# EAGLE board MultiWiiChassis_inconsistent (EAGLE 6.2)
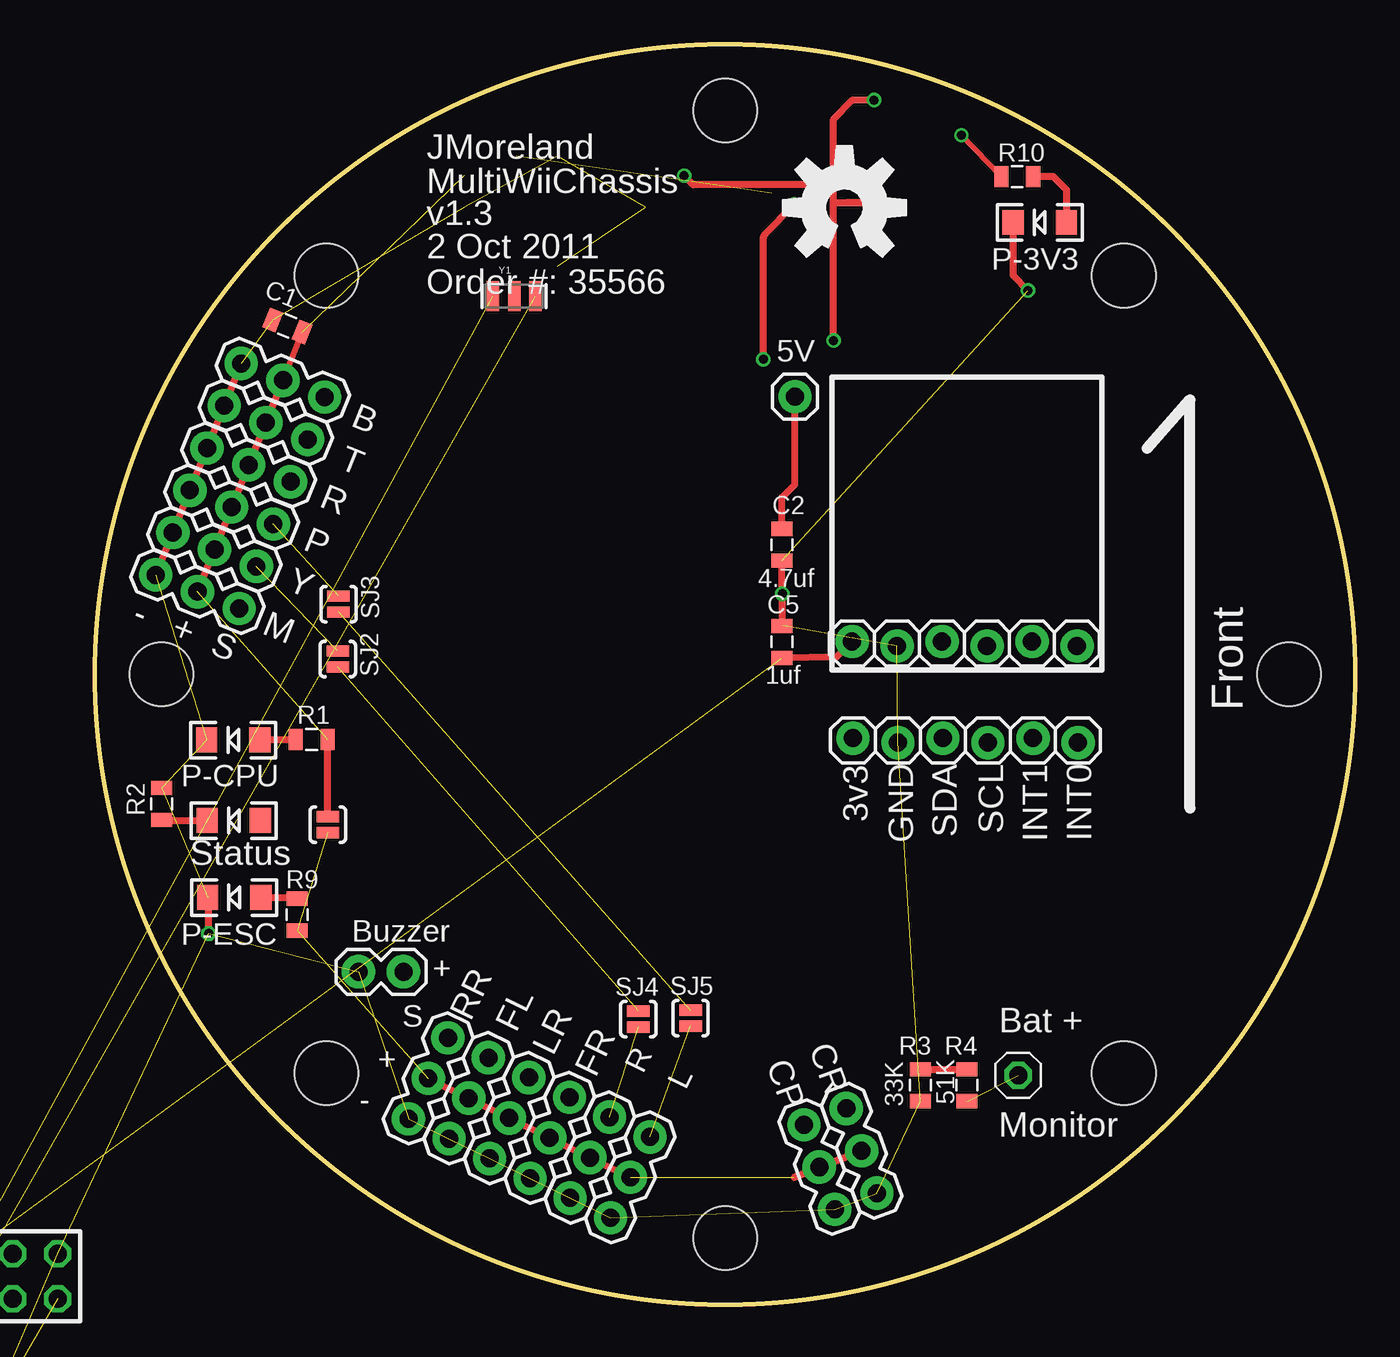
[diagram p0: board, top side]
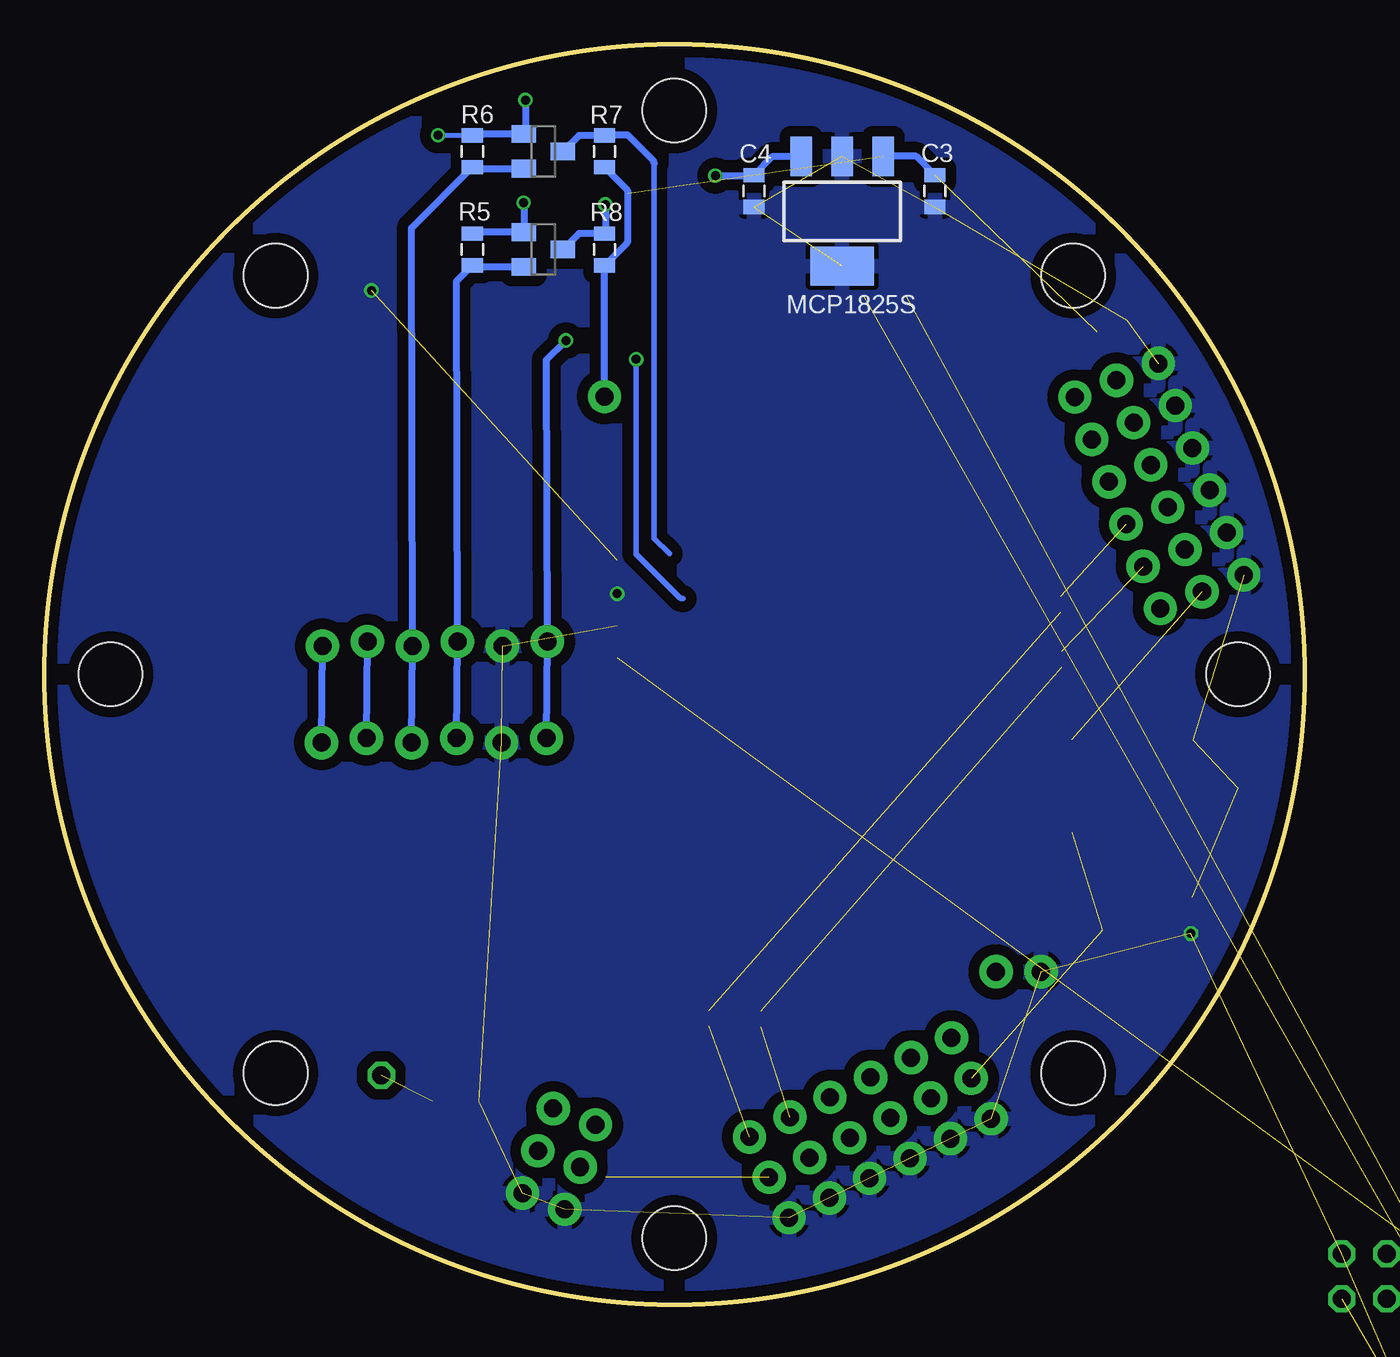
[diagram p1: board, bottom side, seen from below]

Size 71.12 x 71.12 mm. Coordinates in mm from the lower left corner, seen from the top.
Outline: circle at 35.56,35.56 radius 35.56
Copper layers (1*16): Top 0.035mm / dielectric 1.5mm / Bottom 0.035mm
Design rules: minimum track width 6mil, minimum drill 12mil, track to track 6mil, track to pad 6mil, pad to pad 6mil, via to via 6mil, smd to smd 0mil, copper to edge 10mil, drill to drill 10mil, minimum pad ring 10mil, minimum via ring 6mil, stop-mask expansion 2mil, vias tented up to drill 100mil, thermal gap 10mil
Holes 3.6 mm at 35.56,67.38 67.38,35.56 35.56,3.74 3.74,35.56 13.06,13.06 13.06,58.06 58.06,58.06 58.06,13.06

## Footprints (pad centres in the part's own frame; a part is rotated, then mirrored left to right if it is on the bottom)
1X01 = drill 1.016 pad 1.88: 1 0,0
1X02 = drill 1.016 pad 1.88: 1 0,0; 2 2.54,0
SOT23_BOT = smd 1 x 1.4 bottom: D 0,1.1; G 0.98,-1.1; S -0.98,-1.1
0805 = smd 0.8 x 1.2: 1 -0.9,0; 2 0.9,0
1X03 = drill 1.016 pad 1.88: 1 0,0; 2 2.54,0; 3 5.08,0
1X01' = drill 1.016 octagon: 1 0,0
1X06_LOCK = drill 1.016 pad 1.88: 1 0,0; 2 2.54,-0.254; 3 5.08,0; 4 7.62,-0.254; 5 10.16,0; 6 12.7,-0.254
LED-1206 = smd 1.2 x 1.4: A -1.5,0; C 1.5,0
SOT223_BOT = smd 1.219 x 2.235 bottom: 1 2.311,-3.099; 2 0,-3.099; 3 -2.311,-3.099 | smd 3.6 x 2.2 bottom: GNDPAD 0,3.099
AVR-ISP-6 = drill 1.016 square: 1 -2.54,-1.27 | drill 1.016 octagon: 2 -2.54,1.27; 3 0,-1.27; 4 0,1.27; 5 2.54,-1.27; 6 2.54,1.27
0603-RES = smd 1.1 x 1: 1 -0.85,0; 2 0.85,0
TACTILE_SWITCH_SMD = smd 1.524 x 0.762: 1 -2.54,1.905; 2 2.54,1.905; 3 -2.54,-1.905; 4 2.54,-1.905
SJ_2S-NO = smd 0.635 x 1.27: 1 -0.45,0; 2 0.45,0
TQFP32-08 = smd 1.27 x 0.559: 1 -4.293,2.8; 2 -4.293,2; 3 -4.293,1.2; 4 -4.293,0.4; 5 -4.293,-0.4; 6 -4.293,-1.2; 7 -4.293,-2; 8 -4.293,-2.8; 17 4.293,-2.8; 18 4.293,-2; 19 4.293,-1.2; 20 4.293,-0.4; 21 4.293,0.4; 22 4.293,1.2; 23 4.293,2; 24 4.293,2.8 | smd 0.559 x 1.27: 9 -2.8,-4.293; 10 -2,-4.293; 11 -1.2,-4.293; 12 -0.4,-4.293; 13 0.4,-4.293; 14 1.2,-4.293; 15 2,-4.293; 16 2.8,-4.293; 25 2.8,4.293; 26 2,4.293; 27 1.2,4.293; 28 0.4,4.293; 29 -0.4,4.293; 30 -1.2,4.293; 31 -2,4.293; 32 -2.8,4.293
RESONATOR-SMD = smd 0.7 x 1.7: 1 -1.2,0; 2 0,0; 3 1.2,0

## Placement (x,y rotation side)
5V  M01PTH  [1X01]  39.5,51.23 0 top
+  Buzzer  [1X02]  17.4,18.77 180 top
BSS138-SCL  BSS138BOTTOM  [SOT23_BOT]  42.95,65.07 90 top
BSS138-SDA  BSS138BOTTOM  [SOT23_BOT]  42.95,59.54 90 top
C1  4.7uf  [0805]  10.85,55.22 158 top
C2  4.7uf  [0805]  38.76,42.88 270 top
C3  4.7uf  [0805]  20.85,62.84 270 bottom
C4  1uf  [0805]  31.06,62.84 270 bottom
C5  1uf  [0805]  38.76,37.39 90 top
JP1  T  [1X03]  11.99,48.82 158 top
JP2  R  [1X03]  11.02,46.43 158 top
JP3  P  [1X03]  10.06,44.04 158 top
JP4  Y  [1X03]  9.09,41.66 158 top
JP5  M  [1X03]  8.13,39.27 158 top
JP6  CR  [1X03]  42.39,11.05 290 top
JP7  RR  [1X03]  19.91,15.04 244 top
JP8  FL  [1X03]  22.2,13.92 244 top
JP9  LR  [1X03]  24.49,12.8 244 top
JP10  FR  [1X03]  26.77,11.68 244 top
JP11  Bat +  [1X01']  52.1,12.93 0 top
JP12  [1X06_LOCK]  42.77,31.95 0 top
JP13  CP  [1X03]  40.01,10.13 290 top
JP14  B  [1X03]  12.95,51.21 158 top
JP15  R  [1X03]  29.03,10.57 244 top
JP16  [1X06_LOCK]  42.72,37.41 0 top
JP17  L  [1X03]  31.32,9.45 244 top
LED1  Status  [LED-1206]  7.82,27.3 180 top
LED2  P-CPU  [LED-1206]  7.8,31.85 180 top
LED3  P-ESC  [LED-1206]  7.85,22.96 180 top
LED4  P-3V3  [LED-1206]  53.31,61.06 180 top
MCP1825S  V_REG_MCP1825S  [SOT223_BOT]  26.09,61.7 180 top
PDI  AVR-PDIVERT  [AVR-ISP-6]  -4.65,1.57 0 top
R1  470  [0805]  12.22,31.88 0 top
R2  470  [0805]  3.76,28.24 270 top
R3  33K  [0805]  46.58,12.37 90 top
R4  51K  [0805]  49.2,12.37 90 top
R5  10k  [0805]  46.96,59.54 90 bottom
R6  10k  [0805]  46.96,65.07 90 bottom
R7  10k  [0805]  39.5,65.07 270 bottom
R8  10k  [0805]  39.5,59.54 270 bottom
R9  470  [0805]  11.4,22 270 top
R10  470  [0805]  52.04,63.65 180 top
R11  10k  [0603-RES]  -8.1,-11.43 0 top  (outside the outline)
R12  47k  [0603-RES]  -8.1,-8.43 0 top  (outside the outline)
S2  [TACTILE_SWITCH_SMD]  -6.99,-22.5 0 top  (outside the outline)
SJ1  SOLDERJUMPERNO  [SJ_2S-NO]  13.13,27.08 270 top
SJ2  SOLDERJUMPERNO  [SJ_2S-NO]  13.69,36.42 270 top
SJ3  SOLDERJUMPERNO  [SJ_2S-NO]  13.74,39.52 270 top
SJ4  SOLDERJUMPERNO  [SJ_2S-NO]  30.66,16.1 270 top
SJ5  SOLDERJUMPERNO  [SJ_2S-NO]  33.6,16.15 270 top
U1  ATMEGA168  [TQFP32-08]  -15.32,-18.29 0 top  (outside the outline)
U$10  [OSHW-LOGO-L]  42.29,61.9 0 top
Y1  [RESONATOR-SMD]  23.65,56.9 0 top

## Library data of the parts
5V + C1-C5 JP1-JP10 JP12-JP17 LED1-LED4 R1-R12 S2 SJ1-SJ5 U$10 = SparkFun
BSS138-SCL BSS138-SDA MCP1825S = JCM
JP11 = pinhead
PDI = avr-7
U1 = SparkFun-DigitalIC
Y1 = SparkFun-FreqCtrl

## Nets
3.3V: BSS138-SCL.G BSS138-SDA.G C4.1 C5.1 JP12.1 JP16.1 MCP1825S.3 PDI.2 R5.2 R6.2 R10.2 R11.2 R12.2
5V: 5V.1 C1.1 C2.1 C3.1 JP1.2 JP2.2 JP3.2 JP4.2 JP5.2 JP14.2 MCP1825S.1 R1.2 R7.2 R8.2 SJ1.1
BUZZER: +.1
D5: SJ3.2 SJ5.1
D6: SJ2.2 SJ4.1
GND: +.2 C1.2 C2.2 C3.2 C4.2 C5.2 JP1.3 JP2.3 JP3.3 JP4.3 JP5.3 JP6.3 JP7.3 JP8.3 JP9.3 JP10.3 JP12.2 JP13.3 JP14.3 JP15.3 JP16.2 JP17.3 LED2.C LED3.C LED4.C MCP1825S.2 MCP1825S.GNDPAD PDI.6 R2.1 R3.1 S2.1 S2.2 U1.3 U1.5 U1.21
INT0: JP12.6 JP16.6
INT1: JP12.5 JP16.5
N$1: LED1.C R2.2
N$2: LED2.A R1.1
N$3: JP11.1 R4.1
N$4: R3.2 R4.2
N$5: LED1.A
N$6: JP1.1
N$7: JP2.1
N$8: JP3.1 SJ3.1
N$9: JP15.1 SJ4.2
N$10: JP5.1
N$11: JP8.1
N$12: JP7.1
N$13: LED4.A R10.1
N$14: JP10.1
N$15: JP6.1
N$16: LED3.A R9.1
N$17: JP4.1 SJ2.1
N$18: JP17.1 SJ5.2
N$19: JP13.1
N$21: U1.7 Y1.1
N$22: U1.8 Y1.3
N$23: JP9.1
PDI_D: PDI.1 R12.1
RESET: PDI.5 R11.1 S2.3 S2.4
SCL: BSS138-SCL.D R7.1
SCL-L: BSS138-SCL.S JP12.4 JP16.4 R6.1
SDA: BSS138-SDA.D R8.1
SDA-L: BSS138-SDA.S JP12.3 JP16.3 R5.1
VESC: JP6.2 JP7.2 JP8.2 JP9.2 JP10.2 JP13.2 JP15.2 JP17.2 R9.2 SJ1.2

## Tracks (layer width: path | path; a pad name or v marks a point on that pad's centre or on a via)
3.3V  (via drill 0.51)  (3 unrouted)
  Top 0.305: v48.9,65.99 R10.2
  Top 0.406: 41.68,62.18 41.68,63.2 | v41.68,54.41 41.68,62.18 | v33.25,63.7 33.76,63.2 41.68,63.2 | 42.37,62.18 v44.07,62.18 41.68,62.18 | 42.78,67.97 v43.97,67.97 arc45 43.95,67.98 42.76,67.98 41.68,66.9 41.68,63.2 | C5.1 41.85,36.54 JP16.1
  Bottom 0.305: R6.2 v48.9,65.99
  Bottom 0.406: MCP1825S.3 30.01,64.8 C4.1 31.1,63.7 v33.25,63.7 | R6.2 46.88,66.06 BSS138-SCL.G arc-45 43.97,66.26 v43.97,67.97 | R5.2 46.88,60.52 BSS138-SDA.G 44.05,62.16 v44.07,62.18 | v41.68,54.41 42.77,53.31 JP16.1 JP12.1
5V  (3 unrouted)
  Top 0.305: JP14.2 C1.1
  Top 0.406: JP5.2 JP4.2 JP3.2 JP2.2 JP1.2 JP14.2 | 38.62,43.64 C2.1 38.76,45.54 39.5,46.28 5V.1 39.47,51.26 | R1.2 13.12,27.54 SJ1.1
  Bottom 0.406: C3.1 21.91,64.8 MCP1825S.1 | R7.2 38.27,62.95 arc45 38.18,62.72 38.18,60.09 arc45 38.27,59.87 R8.2 5V.1
D5  (1 unrouted)
D6  (1 unrouted)
GND  (via drill 0.51)  (28 unrouted)
  Top 0.305: v38.79,40.11 38.76,40.13
  Top 0.406: JP5.3 JP4.3 JP3.3 JP2.3 JP1.3 JP14.3 | v6.4,20.93 6.4,22.91 LED3.C | 38.76,40.13 C2.2 | v38.79,40.11 38.79,38.31 C5.2 | LED4.C 51.81,58.07 v52.65,57.23
  pour Bottom (isolate 0.61): -0.28,0.1 0.03,71.02 70.74,71.07 70.89,0.1
INT0
  Bottom 0.406: JP12.6 JP16.6
INT1
  Bottom 0.406: JP12.5 JP16.5
N$1
  Top 0.406: R2.2 3.8,27.3 LED1.C
N$2
  Top 0.406: LED2.A 9.32,31.88 R1.1
N$3  (1 unrouted)
N$4
  Top 0.406: R3.2 R4.2
N$8  (1 unrouted)
N$9  (1 unrouted)
N$13
  Top 0.406: R10.1 54.08,63.65 54.84,62.89 54.84,61.09 LED4.A
N$16
  Top 0.406: LED3.A 11.34,22.96 R9.1
N$17  (1 unrouted)
N$18  (1 unrouted)
N$21  (1 unrouted)
N$22  (1 unrouted)
PDI_D  (1 unrouted)
RESET  (3 unrouted)
SCL
  Bottom 0.305: 36.7,64.39 36.7,43.23 35.84,42.37
  Bottom 0.406: R7.1 39.43,66.04 | R7.1 40.95,65.97 BSS138-SCL.D | 36.7,64.39 arc-45 36.8,64.61 38.18,65.99 39.46,65.99 arc-45 R7.1
SCL-L
  Bottom 0.406: BSS138-SCL.S 46.88,64.09 R6.1 50.39,60.75 JP16.4 JP12.4
SDA  (via drill 0.51)
  Top 0.406: v37.72,53.34 37.72,60.17 arc-45 37.81,60.39 v39.45,62.08
  Bottom 0.305: v37.72,53.34 37.73,42.36 35.29,39.92 arc-45 35.06,39.83
  Bottom 0.406: BSS138-SDA.D 40.95,60.44 R8.1 arc-45 39.45,60.56 v39.45,62.08
SDA-L
  Bottom 0.406: BSS138-SDA.S 46.88,58.56 R5.1 47.85,57.75 JP16.3 JP12.3
VESC  (3 unrouted)
  Top 0.406: JP7.2 JP8.2 JP9.2 JP10.2 JP15.2 JP17.2 | 39.45,7.16 JP13.2 JP6.2

## Text on the board
tPlace: JMoreland | MultiWiiChassis | v1.3 | 2 Oct 2011 | Order #: 35566 | - | + | Front | S | GND | SCL | INT0 | 3v3 | SDA | INT1 | S | + | - | Monitor
Document: Round MultiWiiCopter chassis - CPU and Instruments level
201bmp: /Users/jmoreland/Documents/test5.bmp